# Altium PCB Fastino_Ground_Isolator.PcbDoc (part 3 of 4)
Units mm, origin at the board's own origin, x right, y up, seen from the top; angles counter-clockwise.
Board outline 40 x 100 mm, 4 copper layers (Top Layer, Layer 1, Layer 2, Bottom Layer), stack 1.551 mm thick; 157 components, 67 nets, 468 pads, 321 vias.
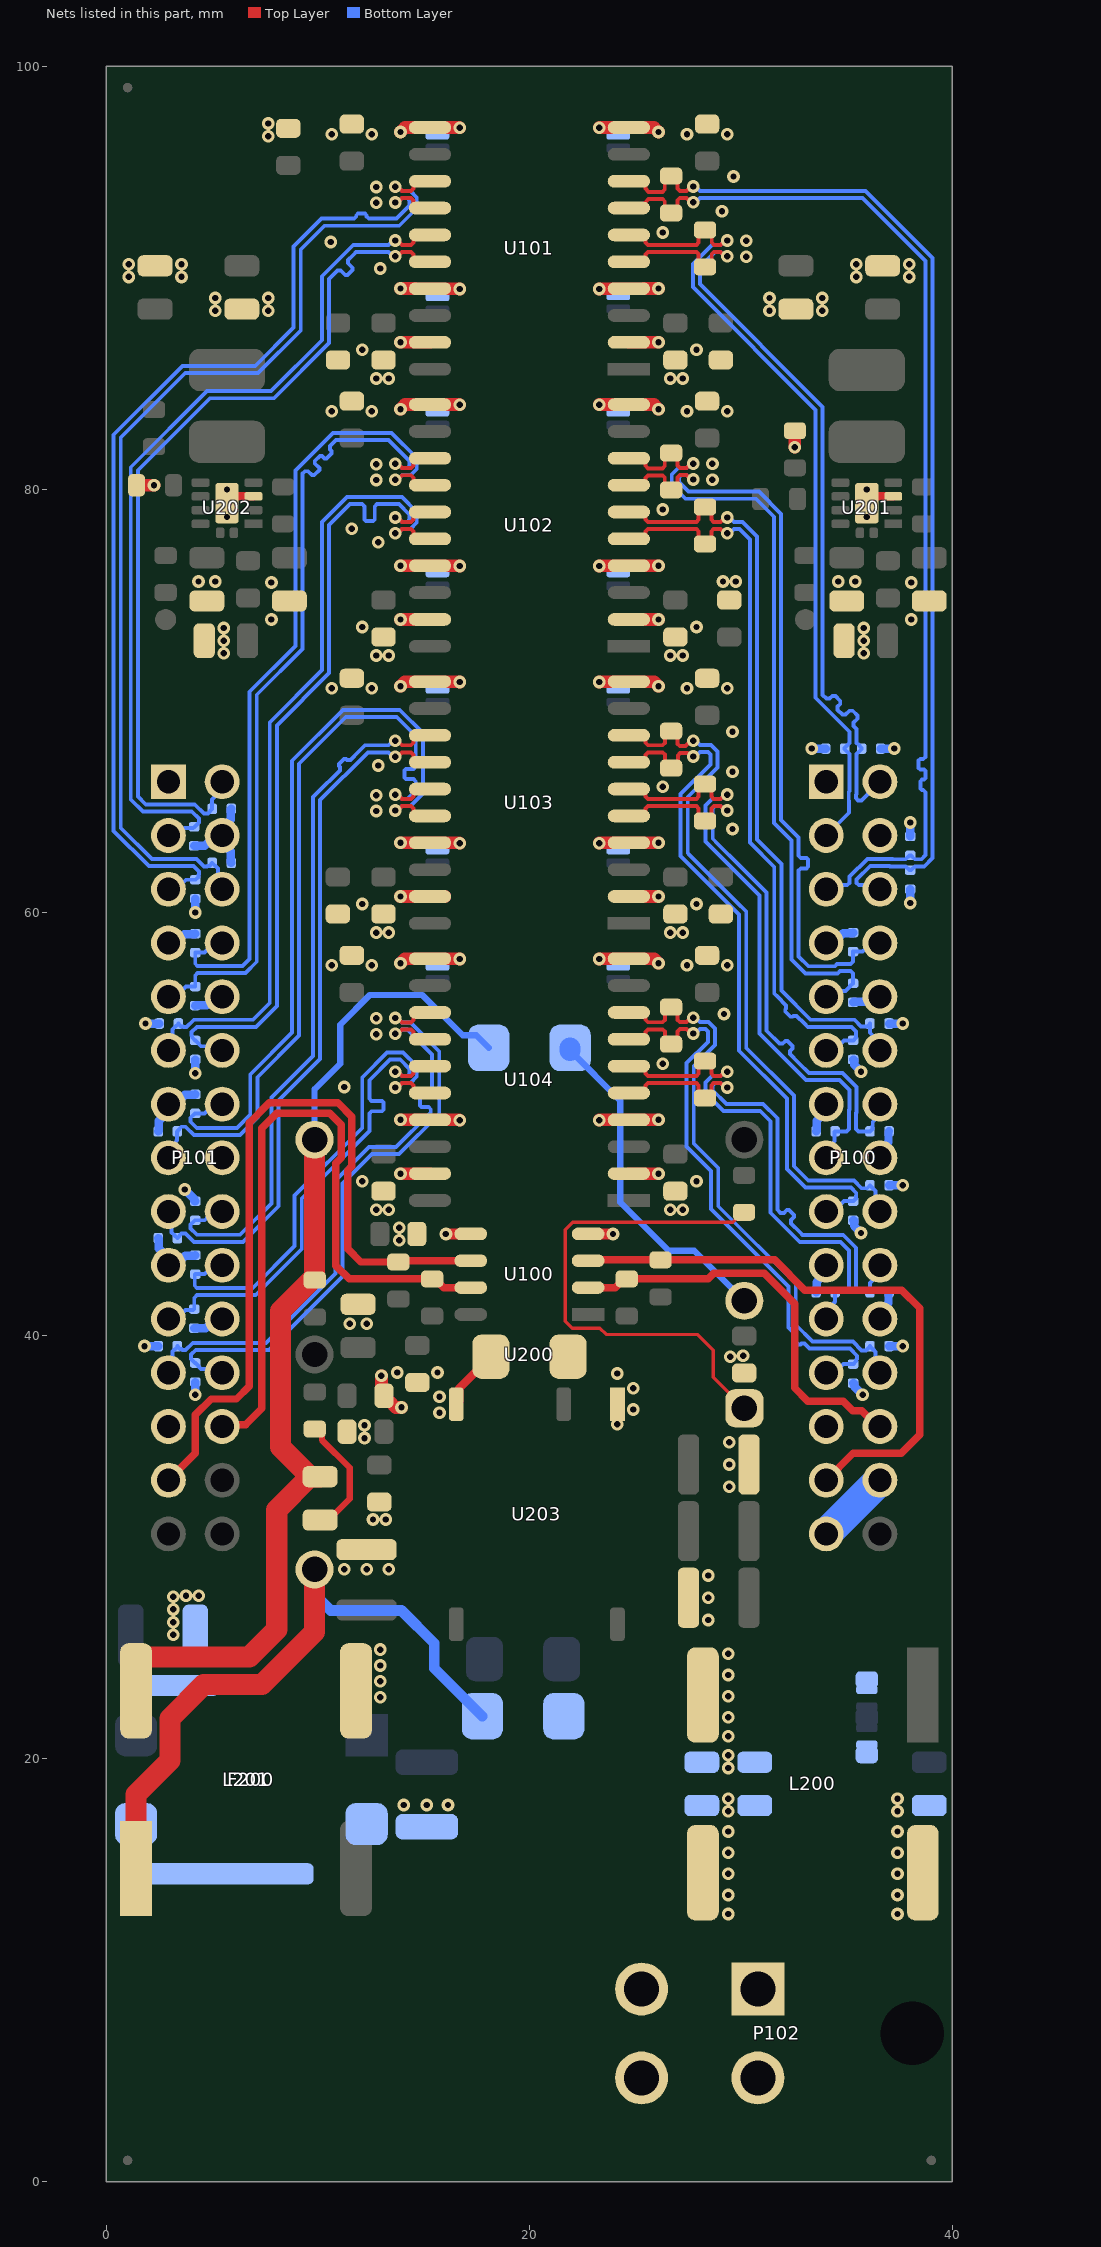
[diagram p4: the nets of this part, all layers, seen from the top]

## Part data (continued)
R200 R201 R202: library part _R_0603_TBD, "Resistor - SMD - TBD - EIA-0603", Case Code - in=0603, Case Code - mm=1608, company part number=-, Package="EIA-0603 (1.60 x 0.80 x 1.25mm)", Value Sort=0, Assembly House Supplier="Assembly House", Category=Resistor, Category_sub=Chip, Check#1 Symbol=PCLE_2018-08-18, Check#2 Attributes=PCLE_2018-08-18, Check#3 Footprint=PCLE_2018-08-18, Check#4 PCB Assembly="___ OK ___", Check#5 Functional="___ OK ___", ComponentLifeCycle=New, Date - Creation="2021-08-17 21:58", date - modification="2021-08-17 21:58", db_component_name=_R_0603_TBD, features=-, Height=1.25mm, ID=1, Manufacturer 1=TBD, Manufacturer Part Number 1=TBD, Mounting=SMD, Nb Terminations=2, Part Status=Active, pricing - digi-key="1=0.00000 / 10=0.00000 / 100=0.00000 / 1000=0.00000 / 2500=0.00000 / 5000=0.00000 USD", pricing - mouser="1=0.00000 / 10=0.00000 / 100=0.00000 / 1000=0.00000 / 2500=0.00000 / 5000=0.00000 USD", Replacement Part Number=-, RoHS=Yes, series=-, Size / Dimension="1.60 x 0.80 x 1.25mm", Supplier 1=TBD, Supplier 2=TBD, Supplier 3=TBD, Supplier 4=TBD, Supplier Part Number 1=TBD, Supplier Part Number 2=TBD, Supplier Part Number 3=TBD, Supplier Part Number 4=TBD, temperature=TBD, Tolerance=TBD, Voltage=TBD
R203 R206 R207 R210: library part Panasonic_ERJ-3EKF5102V, "Resistor - SMD - 51k - ±1% - ±100ppm/°C - 100mW - Thick Film - EIA-0603", Case Code - in=0603, Case Code - mm=1608, company part number=-, Manufacturer 1=Panasonic, Manufacturer Part Number 1=ERJ-3EKF5102V, Package="EIA-0603 (1.60 x 0.80 x 0.55mm)", Power=100mW, Supplier Part Number 1=P51.0KHCT-ND, temperature=-55..+155°C, Temperature Coefficient=±100ppm/°C, Tolerance=±1%, Value Sort=51000, Voltage=75V, Application="Automotive Grade", Assembly House Supplier="Assembly House", Category=Resistor, Category_sub=Chip, Check#1 Symbol=PCLE_2021-06-25, Check#2 Attributes=PCLE_2021-06-25, Check#3 Footprint=PCLE_2021-06-25, Check#4 PCB Assembly="___ OK ___", Check#5 Functional="___ OK ___", ComponentLifeCycle=New, ComponentLink1Description=Datasheet, ComponentLink1URL=https://www.mouser.com/datasheet/2/315/AOA0000C304-1149620.pdf, ComponentLink2Description="ERJ Series, Precision Resistor Datasheet", ComponentLink2URL=https://industrial.panasonic.com/cdbs/www-data/pdf/RDA0000/AOA0000C304.pdf, ComponentLink3Description="Fixed Resistors Product Catalog", ComponentLink3URL=https://industrial.panasonic.com/cdbs/www-data/pdf/RDM0000/DMM0000COL9.pdf, ComponentLink4Description="SMD Resistors Tech Guide", ComponentLink4URL=https://industrial.panasonic.com/cdbs/www-data/pdf/RDM0000/DMM0000COL11.pdf, ComponentLink5Description="ERJ series label chg 14/MAY/2020", ComponentLink5URL=http://media.digikey.com/pdf/PCNs/Panasonic/PCN.PG24.05.14.2020.pdf, Composition="Thick Film", Date - Creation="2021-06-17 22:26", date - modification="2021-06-17 22:26", db_component_name=Panasonic_ERJ-3EKF5102V, features="Automotive AEC-Q200", Height=0.55mm, ID=50, Mounting=SMD, Nb Terminations=2, Part Status=Active, pricing - digi-key="1=0.08000 / 10=0.03000 / 100=0.01220 / 1000=0.00547 / 2500=0.00475 / 5000=0.00392 USD", pricing - mouser="1=0.101 / 10=0.032 / 100=0.013 / 1000=0.006 / 5000=0.004 USD", Qualification=AEC-Q200, Replacement Part Number=-, RoHS=Yes, series=ERJ-3EK, Size / Dimension="1.60 x 0.80 x 0.55mm", Supplier 1=Digi-Key, Supplier 2=Digi-Key, Supplier 3=Digi-Key, Supplier 4=Mouser, Supplier Part Number 2=P51.0KHDKR-ND, Supplier Part Number 3=P51.0KHTR-ND, Supplier Part Number 4=667-ERJ-3EKF5102V, Technology="Thick Film"
R204 R208: library part Panasonic_ERJ-3EKF1502V, "Resistor - SMD - 15k - ±1% - 100 PPM / C - 100mW - 1.60x0.80mm", Case Code - in=0603, Case Code - mm=1608, company part number=-, Manufacturer 1=Panasonic, Manufacturer Part Number 1=ERJ-3EKF1502V, Package="SMD 1.60 x 0.80mm", Power=100mW, Supplier Part Number 1=P15.0KHCT-ND, temperature=-55..+155°C, Temperature Coefficient="100 PPM / C", Tolerance=±1%, Value Sort=15000, Voltage=75V, Application="Automotive Grade", Assembly House Supplier="Assembly House", Category=Resistor, Category_sub=Thick_Film, Check#1 Symbol="___ OK ___", Check#2 Attributes=PCLE_2026-03-30, Check#3 Footprint="___ OK ___", Check#4 PCB Assembly="___ OK ___", Check#5 Functional="___ OK ___", component_type=Thick_Film, ComponentLifeCycle=New, ComponentLink1Description=Datasheet, ComponentLink1URL=https://industrial.panasonic.com/cdbs/www-data/pdf/RDA0000/AOA0000C304.pdf, Date - Creation="2026-03-30 09:20", date - modification="2026-03-30 09:20", db_component_name=Panasonic_ERJ-3EKF1502V, Height=0.45mm, ID=173, Mounting=SMD, Qualification=AEC-Q200, Replacement Part Number=-, series=ERJ-xE, Size / Dimension="1.60 x 0.80 x 0.45mm", Supplier 1=Digi-Key, Supplier 2=Digi-Key, Supplier 3=Digi-Key, Supplier 4=Mouser, Supplier Part Number 2=P15.0KHDKR-ND, Supplier Part Number 3=P15.0KHTR-ND, Supplier Part Number 4=667-ERJ-3EKF1502V, Technology="Thick Film"
Text200: library part LOGO_ETH, "Logo - ETH", Manufacturer 1=-, Package=SMD, temperature=-40..+85°C, Assembly House Supplier=-, Category=Text, Category_sub=Text, Check#1 Symbol=PCLE_2022-10-04, Check#2 Attributes=PCLE_2022-10-04, Check#3 Footprint=PCLE_2022-10-04, Check#4 PCB Assembly=PCLE_2022-10-04, Check#5 Functional=PCLE_2022-10-04, Date - Creation=-, date - modification=-, db_component_name=LOGO_ETH, ID=6, Manufacturer Part Number 1=-, Part Status=Active, pricing - digi-key=-, pricing - mouser=-, RoHS=Yes, Supplier 1=-, Supplier Part Number 1=-
TP200 TP201: library part TP_SMD_Circle_1.00mm, "Test Point - SMD - 1.00mm Pad", company part number=-, Manufacturer 1=noBOM, Package="1.00mm Pad", temperature=-40..+85°C, Assembly House Supplier=Company, Category=Test_and_Measurement, Category_sub=Test_Points, Check#1 Symbol=PCLE_2021-06-28, Check#2 Attributes=PCLE_2021-06-28, Check#3 Footprint=PCLE_2021-06-28, Check#4 PCB Assembly=PCLE_2022-02-14, Check#5 Functional=PCLE_2022-02-14, component_type="Test Point", ComponentLifeCycle=Active, Date - Creation="2022-02-14 15:06", date - modification="2022-02-14 15:06", db_component_name=TP_SMD_Circle_1.00mm, Height=-, ID=4, Manufacturer Part Number 1=noBOM, Mounting=SMD, Part Status=Active, pricing - digi-key=-, pricing - mouser=-, Replacement Part Number=-, RoHS=Yes, Size / Dimension=-, Supplier 1=-, Supplier 2=-, Supplier 3=-, Supplier 4=-, Supplier Part Number 1=-, Supplier Part Number 2=-, Supplier Part Number 3=-, Supplier Part Number 4=-, Type="Test Point"
U100: library part AD_ADUM1255ASA, "Isolator - CAN/I2C - SMD - 2MHz - Unidirectional - 2 Channel - Propagation Delay=133.3 ns - 2.25..5.5V", company part number=-, isolation voltage=445Vrms, Manufacturer 1=AD, Package=SOIC-8, Power=440mW, Supplier Part Number 1=175-ADUM1255ASA+-ND, temperature=-40..+125°C, Assembly House Supplier="Assembly House", Category=Interface_ICs, Category_sub=Digital_Isolators, Check#1 Symbol=PCLE_2026-03-30, Check#2 Attributes=PCLE_2026-03-30, Check#3 Footprint=PCLE_2026-03-30, Check#4 PCB Assembly=-, Check#5 Functional=-, component_type="Isolator - Digital", ComponentLifeCycle=New, ComponentLink1Description=Datasheet, ComponentLink1URL=https://www.analog.com/media/en/technical-documentation/data-sheets/adum1255.pdf, Date - Creation="2026-03-27 12:27", date - modification="2026-03-27 12:27", db_component_name=AD_ADUM1255ASA, forward channels="2 Channel", ID=2, isolation type="Galvanic Isolation", isupply=1mA, Manufacturer Part Number 1=ADUM1255ASA+, maximum fall time="64.7 ns", Mounting=SMD, nb channels="2 Channel", Polarity=Unidirectional, product="Digital Isolators", propagation delay time="133.3 ns", pulse width distortion="94.2 ns", Replacement Part Number=-, RoHS=Yes, series=ADUM1255, Size / Dimension=-, Supplier 1=Digi-Key, Type="Digital Isolator", vsupply=2.25..5.50V
U101 U102 U103 U104: library part AD_ADN4654BRWZ, "Isolator - LVDS - SMD - 1.25 Gb/s - Unidirectional - 2 Channel - Propagation Delay=4 ns - 2V5", company part number=-, isolation voltage=5000Vrms, Manufacturer 1=AD, Package=SOIC-20, Power=2.78W, Supplier Part Number 1=505-ADN4654BRWZ-ND, temperature=-40..+125°C, Assembly House Supplier="Assembly House", Category=Interface_ICs, Category_sub=Digital_Isolators, Check#1 Symbol=PCLE_2026-03-30, Check#2 Attributes=PCLE_2026-03-30, Check#3 Footprint=PCLE_2026-03-30, Check#4 PCB Assembly=-, Check#5 Functional=-, component_type="Isolator - Digital", ComponentLifeCycle=New, ComponentLink1Description=Datasheet, ComponentLink1URL=https://www.analog.com/media/en/technical-documentation/data-sheets/ADN4654-4655-4656.pdf, data rate="1.25 Gb/s", Date - Creation="2026-03-27 12:46", date - modification="2026-03-27 12:46", db_component_name=AD_ADN4654BRWZ, forward channels="2 Channel", ID=3, isolation type="Magnetic Coupling", isupply=60mA, Manufacturer Part Number 1=ADN4654BRWZ, maximum fall time="350 ps", maximum rise time="350 ps", Mounting=SMD, nb channels="2 Channel", Polarity=Unidirectional, product="Digital Isolators", propagation delay time="4 ns", Replacement Part Number=-, RoHS=Yes, series=ADN4654, Size / Dimension=-, Supplier 1=Digi-Key, Type="LVDS Gigabit Isolator", vsupply=2.38..2.62V
U200: library part XP-Power_BCT40T24S12, "DC_DC_Converter - Isolated - 1 Output - Vin=9V..36V - Vout=12V - Imax=3.33 A", company part number=-, input voltage=9V..36V, input voltage - max=36V, input voltage - min=9V, input voltage, nominal=24V, isolation voltage=2kV, Manufacturer 1="XP Power", output current-channel 1="3.33 A", output power=40W, output voltage-channel 1=12V, Package="THT 25.40 x 25.40mm", Supplier Part Number 1=1470-BCT40T24S12-ND, temperature=-40..+105°C, Assembly House Supplier="Assembly House", Category=DC-DC_Converters, Category_sub=DC_DC_Converters_-_Through_Hole, Check#1 Symbol=PCLE_2026-04-13, Check#2 Attributes=PCLE_2026-03-31, Check#3 Footprint=PCLE_2026-04-13, Check#4 PCB Assembly=-, Check#5 Functional=-, component_type=DC_DC_Converter, ComponentLifeCycle=New, ComponentLink1Description=Datasheet, ComponentLink1URL=https://mm.digikey.com/Volume0/opasdata/d220001/medias/docus/7179/BCT40T.pdf, Date - Creation="2026-03-30 18:50", date - modification="2026-03-30 18:50", db_component_name=XP-Power_BCT40T24S12, dimensions="25.4 mm x 25.4 mm x 10 mm", Height=10.50mm, ID=14, industry=Industrial, Isolation=Isolated, Manufacturer Part Number 1=BCT40T24S12, Mounting=THT, Nb Outputs="1 Output", Part Status="New Product", product=Isolated, Replacement Part Number=-, RoHS=Yes, series=BCT40T, Size / Dimension="25.40 x 25.40 x 10.50mm", Supplier 1=Digi-Key, Supplier 2=Digi-Key, Supplier 3=Digi-Key, Supplier 4=Mouser, Supplier Part Number 2=1470-BCT40T24S12-ND, Supplier Part Number 3=1470-BCT40T24S12-ND, Supplier Part Number 4=209-BCT40T24S12
U201 U202: library part RECOM_RPL-1.0-R, "IC - DC-DC switcher - Vin=3V..22V - Vout=600mV..12V - IOut=1A - 1 Output", company part number=-, input voltage=3V..22V, input voltage - max=22V, input voltage - min=3V, Manufacturer 1=RECOM, Package=LGA-11, Quiescent Current="5 uA", Supplier Part Number 1=945-RPL-1.0-RCT-ND, Switching Frequency="1.25 GHz", temperature=-40..+125°C, Assembly House Supplier="Assembly House", Category=PMIC_-_Power_Management_ICs, Category_sub=Switching_Voltage_Regulators, Check#1 Symbol=PCLE_2026-03-30, Check#2 Attributes=PCLE_2026-03-30, Check#3 Footprint=PCLE_2026-03-30, Check#4 PCB Assembly=-, Check#5 Functional=-, component_type="IC - DC-DC switcher", ComponentLifeCycle=New, ComponentLink1Description=Datasheet, ComponentLink1URL=https://www.mouser.com/datasheet/3/887/1/RPL_1.0.pdf, Date - Creation="2026-03-27 17:01", date - modification="2026-03-27 17:01", db_component_name=RECOM_RPL-1.0-R, ID=7, iout=1A, Manufacturer Part Number 1=RPL-1.0-R, Mounting=SMD, Nb Outputs="1 Output", Replacement Part Number=-, RoHS=Yes, series=RPL-1.0, shutdown=Shutdown, Size / Dimension=-, Supplier 1=Digi-Key, Supplier 2=Digi-Key, Supplier 3=Digi-Key, Supplier 4=Mouser, Supplier Part Number 2=945-RPL-1.0-RDKR-ND, Supplier Part Number 3=945-RPL-1.0-RTR-ND, Supplier Part Number 4=919-RPL-1.0-R, vout=600mV..12V
U203: library part XP-Power_PBT01F03S3V3, "DC_DC_Converter - SMD - Isolated - 1 Output - Vin=3V..3.60V - Vout=3.30V - Imax=303 mA", company part number=-, input voltage=3V..3.60V, input voltage - max=3.60V, input voltage - min=3V, input voltage, nominal=3.30V, isolation voltage=1kV, Manufacturer 1="XP Power", output current-channel 1="303 mA", output power=1W, Package="SMD 12.75 x 10.70mm", temperature=-40..+105°C, Application="Industrial, Instrumentation", Assembly House Supplier="Assembly House", Category=DC-DC_Converters, Category_sub=DC_DC_Converters_-_SMD, Check#1 Symbol=PCLE_2026-03-30, Check#2 Attributes=PCLE_2026-03-23, Check#3 Footprint=PCLE_2026-03-30, Check#4 PCB Assembly=-, Check#5 Functional=-, component_type=DC_DC_Converter, ComponentLifeCycle=New, ComponentLink1Description=Datasheet, ComponentLink1URL=https://www.mouser.com/catalog/specsheets/XP_Power_SF_PBT01F.pdf, Date - Creation="2026-03-23 21:00", date - modification="2026-03-23 21:00", db_component_name=XP-Power_PBT01F03S3V3, dimensions="12.75 mm x 10.7 mm x 7 mm", Height=7.00mm, ID=13, industry=Industrial, Isolation=Isolated, Manufacturer Part Number 1=PBT01F03S3V3, Mounting=SMD, Nb Outputs="1 Output", output voltage-channel 1=3.30V, Part Status="New Product", product=Isolated, Replacement Part Number=-, RoHS=Yes, series=PBT01, Size / Dimension="12.75 x 10.70 x 7.00mm", Supplier 1=Digi-Key, Supplier 2=Digi-Key, Supplier 3=Digi-Key, Supplier 4=Mouser, Supplier Part Number 1=PBT01F03S3V3, Supplier Part Number 2=PBT01F03S3V3, Supplier Part Number 3=PBT01F03S3V3, Supplier Part Number 4=209-PBT01F03S3V3
Z200: library part Stackup_4L, company part number=-, Manufacturer 1=TBD, Package=SMD, temperature=-40..+85°C, Assembly House Supplier=Company, Category=PCB, Category_sub=Assembly, Check#1 Symbol=PCLE_2021-10-04, Check#2 Attributes=PCLE_2021-10-04, Check#3 Footprint=PCLE_2021-10-04, Check#4 PCB Assembly=PCLE_2021-10-04, Check#5 Functional=PCLE_2021-10-04, ComponentLifeCycle=New, Date - Creation=2021-10-04, date - modification=2021-10-04, db_component_name=Stackup_4L, Height=-, ID=3, Manufacturer Part Number 1=TBD, Mounting=SMD, Part Status=Active, pricing - digi-key=-, pricing - mouser=-, Replacement Part Number=-, RoHS=Yes, Size / Dimension=-, Supplier 1=-, Supplier 2=-, Supplier 3=-, Supplier 4=-, Supplier Part Number 1=-, Supplier Part Number 2=-, Supplier Part Number 3=-, Supplier Part Number 4=-, Type=-

## Via types
v1: diameter 0.6, hole 0.3, Top Layer to Bottom Layer, 321 vias

## Nets (pads, with @x,y where several pads share a name; then routed paths per layer and width w, separated by ;. In a path a pad name is that pad's centre, name@x,y a point inside that pad or via, vN(x,y) a via of type N, cw(c..) or ccw(c..) an arc to the next point about the centre after c; other vN are vias at no path point)
CH_0_N: D104.1 P100.3 R106.1 U101.6 | length 38.8
  Top Layer w0.185: U101.6@24.7,92.035 25.288,92.035 25.479,91.843 25.479,91.684 25.596,91.568 27.008,91.568 27.892,91.567 28,91.676 28,91.976 28.299,92.275 28.317,92.275 28.617,91.976 28.617,91.676 28.725,91.568 29.034,91.568 29.241,91.774 v1(29.35,91.774)
  Bottom Layer w0.185: v1(29.35,91.774) 29.241,91.774 29.034,91.568 28.634,91.568 27.723,90.656 27.723,89.567 33.523,83.767 33.523,70.154 35.132,68.544 35.132,68.016 34.9,67.783 D104.1@34.9,67.75 34.9,67.717 35.132,67.484 35.132,65.74 35.097,65.704 35.097,65.273 35.105,65.264 35.105,64.715 P100.3@34.03,63.64
CH_0_P: D100.1 P100.2 R106.2 U101.5 | length 38.8
  Top Layer w0.185: U101.5@24.7,90.765 25.288,90.765 25.479,90.957 25.479,91.116 25.596,91.232 26.869,91.232 27.892,91.232 28,91.124 28,90.824 28.299,90.525 28.317,90.525 28.617,90.824 28.617,91.124 28.725,91.232 29.034,91.232 29.241,91.025 v1(29.35,91.025)
  Bottom Layer w0.185: v1(29.35,91.025) 29.241,91.025 29.034,91.232 28.772,91.232 28.058,90.518 28.058,89.706 33.858,83.906 33.858,71.092 33.858,70.292 34.041,70.109 34.194,70.109 34.317,70.232 34.468,70.232 34.695,70.005 34.695,69.853 34.571,69.73 34.571,69.579 34.798,69.352 34.95,69.352 35.136,69.538 35.287,69.538 35.514,69.311 35.514,69.159 35.329,68.974 35.329,68.821 35.467,68.683 35.467,68.016 35.548,67.936 35.7,67.783 D100.1@35.7,67.75 35.7,67.717 35.467,67.484 35.467,65.601 35.432,65.565 35.432,65.412 35.54,65.303 35.693,65.303 P100.2@36.57,66.18
CH_0_R_N: D120.1 P101.3 U101.15 | length 41.9
  Top Layer w0.185: v1(13.65,91.775) 13.759,91.775 13.966,91.568 14.404,91.568 14.521,91.684 14.521,91.843 14.712,92.035 U101.15@15.3,92.035
  Bottom Layer w0.185: P101.3@2.93,63.64 3.326,63.64 3.684,63.998 4.098,63.998 D120.1@4.15,64.05 4.164,64.05 4.369,64.255 4.369,64.444 4.035,64.779 1.722,64.779 1.15,65.35 1.15,81.05 4.75,84.65 7.776,84.65 10.182,87.056 10.182,90.082 11.668,91.568 13.334,91.568 13.541,91.775 v1(13.65,91.775)
CH_0_R_P: D116.1 P101.2 U101.16 | length 41.9
  Top Layer w0.185: v1(13.65,91.026) 13.759,91.026 13.966,91.233 14.404,91.233 14.521,91.116 14.521,90.957 14.712,90.765 U101.16@15.3,90.765
  Bottom Layer w0.185: P101.2@5.47,66.18 5.47,65.815 5,65.345 D116.1@5,64.9 5,64.886 4.795,64.681 4.606,64.681 4.173,65.114 1.86,65.114 1.485,65.489 1.485,80.911 4.889,84.315 7.915,84.315 10.517,86.917 10.517,89.943 10.925,90.352 11.079,90.352 11.29,90.14 11.393,90.14 11.633,90.38 11.633,90.483 11.422,90.695 11.422,90.848 11.668,91.094 11.806,91.233 13.334,91.233 13.541,91.026 v1(13.65,91.026)
CH_1_N: D112.1 P100.6 R110.1 U101.8 | length 51.1
  Top Layer w0.185: U101.8@24.7,94.575 25.288,94.575 25.479,94.383 25.479,94.224 25.634,94.069 26.289,94.069 26.398,94.178 26.398,94.526 26.697,94.825 26.706,94.825 27.005,94.526 27.005,94.226 27.113,94.118 27.434,94.118 27.641,94.324 v1(27.75,94.324)
  Bottom Layer w0.185: v1(27.75,94.324) 27.859,94.324 28.066,94.118 35.883,94.118 39.058,90.943 39.058,62.574 38.666,62.182 38.218,62.182 38.036,62 37.964,62 37.782,62.182 37.047,62.182 37.027,62.203 36.113,62.203 35.468,61.557 35.468,61.403 35.576,61.295 36.375,61.295 P100.6@36.57,61.1
CH_1_P: D108.1 P100.5 R110.2 U101.7 | length 51.1
  Top Layer w0.185: U101.7@24.7,93.305 25.288,93.305 25.479,93.497 25.479,93.58 25.634,93.734 26.289,93.734 26.398,93.626 26.398,93.374 26.697,93.075 R110.2@26.7,93.075 26.706,93.075 27.005,93.374 27.005,93.674 27.113,93.783 27.434,93.783 27.641,93.575 v1(27.75,93.575)
  Bottom Layer w0.185: v1(27.75,93.575) 27.859,93.575 28.066,93.782 35.744,93.782 38.723,90.804 38.723,67.936 38.723,67.358 38.614,67.25 38.475,67.25 38.402,67.177 38.402,66.837 38.475,66.765 38.65,66.765 38.723,66.692 38.723,66.352 38.65,66.28 38.561,66.28 38.488,66.207 38.488,65.867 38.561,65.795 38.614,65.795 38.723,65.686 38.723,65.032 38.723,62.712 38.528,62.518 38.218,62.518 38.036,62.7 37.964,62.7 37.782,62.518 37.185,62.518 37.165,62.538 35.975,62.538 35.133,61.695 35.133,61.403 35.024,61.295 34.225,61.295 P100.5@34.03,61.1
CH_1_R_N: D128.1 P101.6 U101.13 | length 49.5
  Top Layer w0.185: v1(13.65,94.315) 13.759,94.315 13.966,94.108 14.404,94.108 14.521,94.224 14.521,94.383 14.712,94.575 U101.13@15.3,94.575
  Bottom Layer w0.185: D128.1@5,62.35 D128.1@5,62.336 ; P101.6@5.47,61.1 5.265,61.305 5.265,62.084 5.157,62.193 5.143,62.193 D128.1@5,62.336 ; v1(13.65,94.315) 13.759,94.315 13.966,94.108 14.366,94.108 14.671,93.803 14.671,93.296 13.843,92.468 10.304,92.468 9.185,91.349 9.185,87.511 7.174,85.5 3.727,85.5 0.677,82.45 0.677,63.996 2.146,62.528 4.259,62.528 4.606,62.181 4.759,62.181 4.783,62.205 4.869,62.205 D128.1@5,62.336
CH_1_R_P: D124.1 P101.5 U101.14 | length 49.5
  Top Layer w0.185: v1(13.65,93.566) 13.759,93.566 13.966,93.773 14.404,93.773 14.521,93.656 14.521,93.497 14.712,93.305 U101.14@15.3,93.305
  Bottom Layer w0.185: P101.5@2.93,61.1 3.315,61.1 3.765,61.55 D124.1@4.2,61.55 4.214,61.55 4.345,61.681 4.345,61.767 4.369,61.791 4.369,61.944 4.121,62.192 2.008,62.192 0.342,63.858 0.342,82.589 3.589,85.835 7.035,85.835 8.85,87.65 8.85,91.488 10.165,92.803 11.609,92.803 11.701,92.803 11.81,92.911 11.81,92.966 11.882,93.039 12.222,93.039 12.295,92.966 12.295,92.911 12.403,92.803 13.05,92.803 13.704,92.803 14.336,93.435 14.336,93.664 14.228,93.773 13.966,93.773 13.759,93.566 v1(13.65,93.566)
CH_2_N: D113.1 P100.9 R111.1 U102.8 | length 37.5
  Top Layer w0.185: U102.8@25.288,81.475 25.479,81.283 25.479,81.124 25.603,81 26.289,81 26.398,81.109 26.398,81.426 26.697,81.725 26.706,81.725 27.005,81.426 27.005,81.126 27.113,81.018 27.434,81.018 27.641,81.224 v1(27.75,81.224)
  Bottom Layer w0.185: v1(27.75,81.224) 27.641,81.224 27.434,81.018 27.034,81.018 26.729,80.713 26.729,80.206 27.372,79.563 30.713,79.563 31.565,78.711 31.565,64.235 32.393,63.408 32.393,57.779 33.047,57.125 34.577,57.125 34.685,57.232 35.192,57.232 35.3,57.124 D113.1@35.3,56.65 35.286,56.65 35.155,56.519 35.155,56.505 34.945,56.295 34.305,56.295 P100.9@34.03,56.02
CH_2_P: D109.1 P100.8 R111.2 U102.7 | length 37.5
  Top Layer w0.185: U102.7@24.7,80.205 25.288,80.205 25.479,80.397 25.479,80.542 25.603,80.665 26.289,80.665 26.398,80.557 26.398,80.274 26.697,79.975 26.706,79.975 27.005,80.274 27.005,80.574 27.113,80.683 27.434,80.683 27.641,80.476 v1(27.75,80.476)
  Bottom Layer w0.185: v1(27.75,80.476) 27.641,80.476 27.434,80.683 27.173,80.683 27.064,80.574 27.064,80.345 27.511,79.898 28.095,79.898 30.848,79.898 30.852,79.898 31.9,78.85 31.9,64.374 32.728,63.546 32.728,63.1 32.728,62.683 32.836,62.574 33.096,62.574 33.169,62.502 33.169,62.162 33.096,62.089 32.836,62.089 32.728,61.981 32.728,61.403 32.728,57.918 33.185,57.46 34.439,57.46 34.546,57.567 35.192,57.567 35.3,57.676 D109.1@35.3,58.15 35.746,58.15 35.876,58.28 36.29,58.28 P100.8@36.57,58.56
CH_2_R_N: D129.1 P101.9 U102.13 | length 39.5
  Top Layer w0.185: v1(13.65,81.215) 13.759,81.215 13.966,81.008 14.404,81.008 14.521,81.124 14.521,81.283 14.712,81.475 U102.13@15.3,81.475
  Bottom Layer w0.185: P101.9@2.93,56.02 3.285,56.02 3.765,56.5 D129.1@4.2,56.5 4.2,57.024 4.308,57.132 6.568,57.132 7.108,57.672 7.108,70.297 9.277,72.467 9.277,80.307 9.277,80.754 9.386,80.862 9.539,80.862 9.721,80.681 9.824,80.681 10.064,80.921 10.064,81.024 9.85,81.237 9.85,81.34 10.09,81.58 10.193,81.58 10.304,81.469 10.407,81.469 10.647,81.709 10.647,81.812 10.561,81.898 10.561,82.051 10.835,82.325 10.853,82.342 13.339,82.342 14.336,81.345 14.336,81.116 14.228,81.008 13.966,81.008 13.759,81.215 v1(13.65,81.215)
CH_2_R_P: D125.1 P101.8 U102.14 | length 39.5
  Top Layer w0.185: v1(13.65,80.466) 13.759,80.466 13.966,80.673 14.404,80.673 14.521,80.556 14.521,80.397 14.712,80.205 U102.14@15.3,80.205
  Bottom Layer w0.185: P101.8@5.47,58.56 5.095,58.56 4.635,58.1 D125.1@4.2,58.1 4.2,57.576 4.308,57.467 6.429,57.467 6.773,57.811 6.773,70.436 8.942,72.606 8.942,80.906 10.714,82.678 13.477,82.678 14.671,81.484 14.671,80.977 14.366,80.673 13.966,80.673 13.759,80.466 v1(13.65,80.466)
CH_3_N: D105.1 P100.12 R107.1 U102.6 | length 35.5
  Top Layer w0.185: U102.6@25.288,78.935 25.479,78.743 25.479,78.584 25.596,78.468 26.321,78.468 27.008,78.468 27.892,78.467 28,78.576 28,78.876 28.299,79.175 28.599,78.876 28.599,78.576 28.707,78.468 29.034,78.468 29.241,78.674 v1(29.35,78.674)
  Bottom Layer w0.185: v1(29.35,78.674) 29.459,78.674 29.666,78.468 30.066,78.468 30.758,77.776 30.758,63.443 31.908,62.293 31.908,56.316 33.296,54.927 35.359,54.927 35.682,54.605 35.969,54.605 36.1,54.736 D105.1@36.1,54.75 ; D105.1@36.1,54.746 36.1,54.315 36.57,53.845 P100.12@36.57,53.48
CH_3_P: D101.1 P100.11 R107.2 U102.5 | length 35.5
  Top Layer w0.185: U102.5@25.288,77.665 25.479,77.857 25.479,78.016 25.596,78.133 26.182,78.133 26.869,78.133 27.892,78.132 28,78.024 28,77.724 28.299,77.425 28.599,77.724 28.599,78.024 28.707,78.132 28.77,78.132 29.034,78.133 29.241,77.926 v1(29.35,77.926)
  Bottom Layer w0.185: v1(29.35,77.926) 29.459,77.926 29.666,78.133 29.928,78.133 30.408,77.652 30.422,77.638 30.422,75.869 30.422,63.304 31.572,62.154 31.572,56.178 31.73,56.02 32.138,55.612 32.138,55.458 32.095,55.415 32.095,55.312 32.335,55.072 32.438,55.072 32.481,55.115 32.635,55.115 33.004,54.746 33.158,54.592 35.221,54.592 35.445,54.368 35.445,54.081 35.314,53.95 34.865,53.95 34.395,53.48 P100.11@34.03,53.48
CH_3_R_N: D121.1 P101.12 U102.15 | length 39.1
  Top Layer w0.185: v1(13.65,78.675) 13.759,78.675 13.966,78.467 14.404,78.467 14.521,78.584 14.521,78.743 14.712,78.935 U102.15@15.3,78.935
  Bottom Layer w0.185: P101.12@5.47,53.48 5.276,53.674 4.476,53.674 4.357,53.792 4.357,53.807 4.214,53.95 4.186,53.95 4.055,54.081 4.055,54.167 4.031,54.191 4.031,54.344 4.279,54.593 7.066,54.593 8.057,55.584 8.057,68.847 10.527,71.317 10.527,78.317 11.516,79.305 ; 11.516,79.305 12.094,79.305 12.202,79.197 12.202,78.585 12.275,78.512 12.614,78.512 12.687,78.585 12.687,79.197 12.796,79.305 13.1,79.305 13.836,79.305 14.336,78.805 14.336,78.576 14.227,78.468 13.966,78.468 13.759,78.675 v1(13.65,78.675)
CH_3_R_P: D117.1 P101.11 U102.16 | length 39.1
  Top Layer w0.185: v1(13.65,77.926) 13.759,77.926 13.966,78.132 14.404,78.132 14.521,78.016 14.521,77.857 14.712,77.665 U102.16@15.3,77.665
  Bottom Layer w0.185: P101.11@2.93,53.48 3.124,53.674 3.124,54.474 3.255,54.605 3.269,54.605 D117.1@3.4,54.736 ; D117.1@3.4,54.75 D117.1@3.4,54.736 ; v1(13.65,77.926) 13.759,77.926 13.966,78.133 14.366,78.133 14.671,78.437 14.671,78.944 13.975,79.64 11.377,79.64 10.192,78.456 10.192,71.456 7.722,68.986 7.722,55.722 6.928,54.928 4.141,54.928 3.794,54.581 3.641,54.581 3.617,54.605 3.531,54.605 D117.1@3.4,54.736
CH_4_N: D106.1 P100.15 R108.1 U103.6 | length 27.8
  Top Layer w0.185: U103.6@25.288,65.835 25.479,65.643 25.479,65.484 25.596,65.368 26.019,65.368 27.754,65.367 27.892,65.367 28,65.476 28,65.776 28.299,66.075 28.303,66.075 28.602,65.776 28.602,65.476 28.71,65.367 29.034,65.367 29.241,65.574 v1(29.35,65.574)
  Bottom Layer w0.185: v1(29.35,65.574) 29.241,65.574 29.034,65.367 28.634,65.367 28.329,65.063 28.329,63.347 30.873,60.804 30.873,54.277 33.077,52.073 34.662,52.073 35.129,51.606 35.129,50.679 35.107,50.658 35.107,49.758 34.999,49.65 D106.1@34.45,49.65 34.428,49.628 34.428,49.241 34.418,49.231 34.418,49.184 34.03,48.796 P100.15@34.03,48.4
CH_4_P: D102.1 P100.14 R108.2 U103.5 | length 27.8
  Top Layer w0.185: U103.5@25.288,64.565 25.479,64.757 25.479,64.916 25.596,65.033 25.88,65.033 27.892,65.032 28,64.924 28,64.624 28.299,64.325 28.31,64.325 28.609,64.624 28.609,64.924 28.717,65.032 29.034,65.032 29.241,64.825 v1(29.35,64.825)
  Bottom Layer w0.185: v1(29.35,64.825) 29.241,64.825 29.034,65.032 28.772,65.032 28.664,64.924 28.664,63.486 28.9,63.25 29.9,62.25 31.208,60.943 31.208,54.416 31.263,54.36 31.823,53.8 31.976,53.8 32.098,53.922 32.201,53.922 32.441,53.682 32.441,53.579 32.319,53.457 32.319,53.304 32.728,52.896 33.216,52.408 34.801,52.408 35.464,51.744 35.464,50.54 35.442,50.519 35.442,49.758 35.551,49.65 D102.1@36.1,49.65 36.22,49.77 36.22,49.904 36.232,49.916 36.232,50.099 36.29,50.157 36.29,50.66 P100.14@36.57,50.94
CH_4_R_N: D122.1 P101.15 U103.15 | length 36.8
  Top Layer w0.185: v1(13.65,65.574) 13.759,65.574 13.966,65.367 14.404,65.367 14.521,65.484 14.521,65.643 14.712,65.835 U103.15@15.3,65.835
  Bottom Layer w0.185: P101.15@2.93,48.4 2.93,48.796 3.318,49.184 3.318,49.231 3.328,49.241 3.328,49.628 D122.1@3.35,49.65 3.35,49.664 3.555,49.869 3.744,49.869 4.131,49.482 6.306,49.482 7.135,50.311 7.135,52.211 9.108,54.184 9.108,67.034 11.316,69.243 13.727,69.243 14.623,68.347 14.623,67.474 14.623,66.897 14.514,66.788 14.159,66.788 14.086,66.715 14.086,66.376 14.159,66.303 14.514,66.303 14.623,66.195 14.623,66 14.623,65.763 14.227,65.367 13.966,65.367 13.759,65.574 v1(13.65,65.574)
CH_4_R_P: D118.1 P101.14 U103.16 | length 36.8
  Top Layer w0.185: v1(13.65,64.825) 13.759,64.825 13.966,65.032 14.404,65.032 14.521,64.916 14.521,64.757 14.712,64.565 U103.16@15.3,64.565
  Bottom Layer w0.185: P101.14@5.47,50.94 5.075,50.94 4.635,50.5 4.186,50.5 3.981,50.295 3.981,50.106 4.269,49.817 6.167,49.817 6.8,50.45 6.8,52.35 8.772,54.322 8.772,67.172 11.178,69.578 13.866,69.578 14.958,68.486 14.958,65.624 14.366,65.032 13.966,65.032 13.759,64.825 v1(13.65,64.825)
CH_5_N: D114.1 P100.18 R112.1 U103.8 | length 33.1
  Top Layer w0.185: U103.8@25.222,68.375 25.288,68.375 25.479,68.183 25.479,68.024 25.596,67.908 26.292,67.908 26.4,68.016 26.4,68.325 26.7,68.625 R112.1@26.77,68.555 ; R112.1@26.7,68.575 26.706,68.575 27.005,68.276 27.005,67.976 27.113,67.867 27.384,67.867 27.641,68.124 v1(27.75,68.124)
  Bottom Layer w0.185: v1(27.75,68.124) 27.859,68.124 28.066,67.917 28.58,67.917 28.885,67.613 28.885,66.861 27.485,65.461 27.485,62.815 27.551,62.749 29.795,60.505 30.25,60.05 30.25,53.6 32.508,51.343 32.508,48.003 33.183,47.327 35.34,47.327 35.706,46.962 35.969,46.962 36.1,47.093 D114.1@36.1,47.1 36.1,47.086 36.243,46.943 36.247,46.943 36.355,46.834 36.355,46.075 P100.18@36.57,45.86
CH_5_P: D110.1 P100.17 R112.2 U103.7 | length 33.2
  Top Layer w0.185: U103.7@24.7,67.105 25.288,67.105 25.479,67.297 25.479,67.456 25.596,67.573 26.292,67.573 26.4,67.464 26.4,67.124 26.649,66.875 26.765,66.875 27.014,67.124 27.014,67.424 27.122,67.532 27.481,67.532 27.638,67.375 v1(27.75,67.375)
  Bottom Layer w0.185: v1(27.75,67.375) 27.859,67.375 28.066,67.582 28.442,67.582 28.55,67.474 28.55,67 27.15,65.6 27.15,62.676 29.915,59.911 29.915,53.461 32.173,51.204 32.173,47.864 33.044,46.992 35.201,46.992 35.45,46.744 35.45,46.591 35.445,46.586 35.445,46.481 35.314,46.35 34.862,46.35 34.372,45.86 P100.17@34.03,45.86
CH_5_R_N: D130.1 P101.18 U103.13 | length 33.8
  Top Layer w0.185: v1(13.65,68.115) 13.759,68.115 13.966,67.908 14.404,67.908 14.521,68.024 14.521,68.183 14.712,68.375 U103.13@15.3,68.375
  Bottom Layer w0.185: P101.18@5.47,45.86 5.19,45.58 4.776,45.58 4.646,45.45 4.186,45.45 3.981,45.245 3.981,45.056 4.272,44.765 6.315,44.765 7.8,46.25 7.8,51.25 9.77,53.22 9.77,65.454 9.934,65.618 11.037,66.72 11.037,66.874 10.991,66.919 10.991,67.022 11.231,67.262 11.334,67.262 11.38,67.217 11.533,67.217 11.941,67.625 12.224,67.908 13.334,67.908 13.541,68.115 v1(13.65,68.115)
CH_5_R_P: D126.1 P101.17 U103.14 | length 33.8
  Top Layer w0.185: v1(13.65,67.366) 13.759,67.366 13.966,67.573 14.404,67.573 14.521,67.456 14.521,67.297 14.712,67.105 U103.14@15.3,67.105
  Bottom Layer w0.185: P101.17@2.93,45.86 3.084,45.706 3.084,44.866 3.205,44.745 3.219,44.745 3.219,44.731 D126.1@3.35,44.6 3.35,44.614 3.555,44.819 3.744,44.819 4.133,44.43 6.454,44.43 8.135,46.111 8.135,51.111 10.105,53.081 10.105,65.315 12.363,67.573 13.334,67.573 13.541,67.366 v1(13.65,67.366)
CH_6_N: D107.1 P100.21 R109.1 U104.6 | length 24.1
  Top Layer w0.185: U104.6@24.7,52.735 25.288,52.735 25.479,52.543 25.479,52.384 25.596,52.268 27.008,52.268 27.892,52.268 28,52.376 28,52.676 28.299,52.975 28.599,52.676 28.599,52.376 28.707,52.267 29.034,52.267 29.241,52.474 v1(29.35,52.474)
  Bottom Layer w0.185: v1(29.35,52.474) 29.241,52.474 29.034,52.267 28.634,52.267 28.329,51.963 28.329,51.456 29.17,50.615 30.911,50.615 31.395,50.131 31.395,45.806 32.778,44.422 34.697,44.422 35.108,44.012 35.108,42.158 34.999,42.05 D107.1@34.45,42.05 34.45,41.614 34.418,41.582 34.418,41.564 34.03,41.176 P100.21@34.03,40.78
CH_6_P: D103.1 P100.20 R109.2 U104.5 | length 24.1
  Top Layer w0.185: U104.5@24.7,51.465 25.288,51.465 25.479,51.657 25.479,51.816 25.596,51.933 26.869,51.933 27.892,51.933 28,51.824 28,51.524 28.299,51.225 28.599,51.524 28.599,51.824 28.707,51.932 29.034,51.932 29.241,51.725 v1(29.35,51.725)
  Bottom Layer w0.185: v1(29.35,51.725) 29.241,51.725 29.034,51.932 28.772,51.932 28.664,51.824 28.664,51.595 29.309,50.95 31.05,50.95 31.73,50.27 31.73,46.744 31.73,45.945 31.874,45.801 32.027,45.801 32.163,45.937 32.266,45.937 32.506,45.697 32.506,45.594 32.37,45.458 32.37,45.305 32.778,44.896 32.917,44.758 34.836,44.758 35.443,44.151 35.443,42.158 35.551,42.05 D103.1@36.1,42.05 36.1,42.485 36.57,42.955 P100.20@36.57,43.32
CH_6_R_N: D123.1 P101.21 U104.15 | length 24
  Top Layer w0.185: v1(13.65,52.475) 13.759,52.475 13.966,52.268 14.404,52.268 14.521,52.384 14.521,52.543 14.712,52.735 U104.15@15.3,52.735
  Bottom Layer w0.185: P101.21@2.93,40.78 3.326,40.78 3.744,41.198 4.098,41.198 D123.1@4.15,41.25 4.15,41.774 4.283,41.907 7.057,41.907 9.235,44.085 9.235,46.474 12.428,49.667 12.428,49.916 12.428,50.493 12.536,50.602 13.031,50.602 13.103,50.675 13.103,51.014 13.031,51.087 12.536,51.087 12.428,51.195 12.428,51.824 12.428,52.069 13.411,53.052 13.889,53.052 14.336,52.605 14.336,52.376 14.228,52.268 13.966,52.268 13.759,52.475 v1(13.65,52.475)
CH_6_R_P: D119.1 P101.20 U104.16 | length 24
  Top Layer w0.185: v1(13.65,51.726) 13.759,51.726 13.966,51.932 14.404,51.932 14.521,51.816 14.521,51.657 14.712,51.465 U104.16@15.3,51.465
  Bottom Layer w0.185: P101.20@5.47,43.32 5.19,43.04 4.776,43.04 4.636,42.9 D119.1@4.2,42.9 4.175,42.875 4.175,42.351 4.283,42.242 6.919,42.242 8.9,44.224 8.9,46.613 12.093,49.806 12.093,52.207 13.272,53.387 14.028,53.387 14.671,52.744 14.671,52.237 14.366,51.933 13.966,51.933 13.759,51.726 v1(13.65,51.726)
CH_7_N: D115.1 P100.24 R113.1 U104.8 | length 27.6
  Top Layer w0.185: U104.8@24.7,55.275 25.288,55.275 25.479,55.083 25.479,54.93 25.599,54.81 26.292,54.81 26.4,54.919 26.4,55.226 R113.1@26.7,55.525 26.709,55.525 27.008,55.226 27.008,54.926 27.116,54.817 27.434,54.817 27.641,55.024 v1(27.75,55.024)
  Bottom Layer w0.185: v1(27.75,55.024) 27.859,55.024 28.066,54.817 28.466,54.817 28.771,54.513 28.771,53.744 27.767,52.741 27.767,49.083 28.928,47.923 28.928,46.112 32.59,42.449 32.59,40.51 33.386,39.714 35.292,39.714 35.706,39.3 35.914,39.3 D115.1@36.1,39.486 ; D115.1@36.1,39.5 D115.1@36.1,39.486 ; P100.24@36.57,38.24 36.37,38.44 36.37,39.23 36.257,39.343 36.243,39.343 D115.1@36.1,39.486
CH_7_P: D111.1 P100.23 R113.2 U104.7 | length 27.6
  Top Layer w0.185: U104.7@24.7,54.005 25.288,54.005 25.479,54.197 25.479,54.356 25.599,54.475 26.296,54.475 26.405,54.367 26.405,54.07 R113.2@26.7,53.775 26.706,53.775 27.005,54.074 27.005,54.374 27.113,54.482 27.434,54.482 27.641,54.275 v1(27.75,54.275)
  Bottom Layer w0.185: v1(27.75,54.275) 27.859,54.275 28.066,54.482 28.327,54.482 28.436,54.374 28.436,53.883 27.432,52.879 27.432,52.6 27.432,51.6 27.432,48.944 28.593,47.784 28.593,45.973 32.255,42.311 32.255,40.371 32.274,40.352 32.515,40.111 32.515,39.958 32.473,39.915 32.473,39.812 32.713,39.572 32.816,39.572 32.858,39.615 33.011,39.615 33.077,39.549 33.248,39.379 35.154,39.379 35.488,39.044 35.488,38.891 35.445,38.848 35.445,38.781 35.314,38.65 D111.1@35.3,38.65 34.854,38.65 34.832,38.628 34.814,38.628 34.426,38.24 P100.23@34.03,38.24
CH_7_R_N: D131.1 P101.24 U104.13 | length 28.7
  Top Layer w0.185: v1(13.65,55.015) 13.759,55.015 13.966,54.808 14.404,54.808 14.521,54.924 14.521,55.083 14.712,55.275 U104.13@15.3,55.275
  Bottom Layer w0.185: P101.24@5.47,38.24 5.286,38.424 4.476,38.424 4.357,38.542 4.357,38.557 4.214,38.7 4.186,38.7 4,38.886 4,39.094 4.221,39.315 7.678,39.315 11.158,42.794 11.158,47.184 12.546,48.573 13.836,48.573 15.735,50.472 15.735,53.434 14.747,54.421 14.747,54.426 14.366,54.808 13.966,54.808 13.759,55.015 v1(13.65,55.015)
CH_7_R_P: D127.1 P101.23 U104.14 | length 28.7
  Top Layer w0.185: v1(13.65,54.266) 13.759,54.266 13.966,54.473 14.404,54.473 14.521,54.356 14.521,54.197 14.712,54.005 U104.14@15.3,54.005
  Bottom Layer w0.185: P101.23@2.93,38.24 3.125,38.435 3.125,39.239 3.35,39.464 D127.1@3.35,39.5 ; D127.1@3.35,39.486 3.481,39.355 3.548,39.355 3.591,39.312 3.744,39.312 4.082,39.65 7.539,39.65 10.823,42.933 10.823,47.323 12.408,48.908 13.697,48.908 15.239,50.45 15.332,50.543 15.332,50.696 15.224,50.804 14.889,50.804 14.816,50.877 14.816,51.216 14.889,51.289 15.292,51.289 15.4,51.398 15.4,51.953 15.4,53.295 14.412,54.283 14.412,54.288 14.228,54.473 13.966,54.473 13.759,54.266 v1(13.65,54.266)
GND: C201.2 C208.2 C209.2 C210.2 C211.2 C212.2 C213.2 C214.2 C215.2 C216.2 C217.2 C218.2 C219.2 C220.2 C221.2 C222.2 C223.2 C241.2 C242.2 C250.1 C251.2 C252.2 C253.2 C254.2 C255.2 C260.2 C261.2 C262.2 D100.2 D101.2 D102.2 D103.2 D104.2 D105.2 D106.2 D107.2 D108.2 D109.2 D110.2 D111.2 D112.2 D113.2 D114.2 D115.2 L200.4 P100.1 P100.4 P100.7 P100.10 P100.13 P100.16 P100.19 P100.22 P100.25 P102.1 P102.2 R205.2 U100.4 U101.2 U101.4 U101.10 U102.2 U102.4 U102.10 U103.2 U103.4 U103.10 U104.2 U104.4 U104.10 U201.3 U201.11 U203.1 | length 47.3
  Top Layer w0.4: U201.11@35.95,79.35 36.275,79.675 U201.3@37.2,79.675
  Top Layer w0.5: U100.4@22.775,44.805 22.78,44.8 v1(23.95,44.8)
  Top Layer w0.6: v1(23.3,50.18) 23.315,50.195 24,50.195 U104.4@24.7,50.195 25.4,50.195 25.405,50.2 v1(26.1,50.2) ; v1(23.3,57.8) 23.315,57.815 24,57.815 U104.10@24.7,57.815 25.885,57.815 v1(26.1,57.6) ; v1(23.3,63.28) 23.315,63.295 24,63.295 U103.4@24.7,63.295 25.4,63.295 25.405,63.3 v1(26.1,63.3) ; v1(23.3,70.9) 23.315,70.915 24,70.915 U103.10@24.7,70.915 25.885,70.915 v1(26.1,70.7) ; v1(23.3,76.38) 23.315,76.395 24,76.395 U102.4@24.7,76.395 25.4,76.395 25.405,76.4 v1(26.1,76.4) ; v1(23.3,84) 23.315,84.015 24,84.015 U102.10@24.7,84.015 25.885,84.015 v1(26.1,83.8) ; v1(23.3,89.48) 23.315,89.495 U101.4@24,89.495 ; v1(23.3,97.1) 23.315,97.115 U101.10@24,97.115 ; U101.4@24,89.495 U101.4@24.7,89.495 25.4,89.495 25.405,89.5 v1(26.1,89.5) ; U101.10@24,97.115 U101.10@24.7,97.115 ; U104.2@24.7,47.655 v1(26.1,47.655) ; U103.2@24.7,60.755 v1(26.1,60.755) ; U102.2@24.7,73.855 v1(26.1,73.855) ; U101.2@24.7,86.955 v1(26.1,86.955) ; U101.10@24.7,97.115 25.885,97.115 v1(26.1,96.9) ; v1(32.55,81.995) R205.2@32.55,82.82
  Bottom Layer w0.4: v1(33.35,67.75) D104.2@34,67.75 ; D107.2@33.55,42.05 33.575,42.075 33.575,42.527 34.03,42.982 P100.19@34.03,43.32 ; D106.2@33.55,49.65 33.575,49.675 33.575,50.147 34.03,50.602 P100.13@34.03,50.94 ; P100.7@34.03,58.56 34.368,58.56 34.833,59.025 35.275,59.025 D109.2@35.3,59.05 ; D111.2@35.3,37.75 35.325,37.75 35.35,37.725 35.35,37.6 v1(35.75,37.2) ; D110.2@35.3,45.45 35.325,45.45 35.35,45.425 35.35,45.184 35.675,44.859 v1(35.675,44.85) ; D101.2@35.3,53.05 35.325,53.05 35.35,53.025 35.35,52.809 35.675,52.484 v1(35.675,52.474) ; D113.2@35.3,55.75 35.325,55.775 35.987,55.775 36.232,56.02 P100.10@36.57,56.02 ; P100.22@36.57,40.78 36.57,41.118 36.975,41.523 36.975,42.025 D103.2@37,42.05 ; P100.16@36.57,48.4 36.57,48.738 36.975,49.143 36.975,49.625 D102.2@37,49.65 ; D100.2@36.6,67.75 v1(37.25,67.75) ; D115.2@37,39.5 v1(37.65,39.5) ; D114.2@37,47.1 v1(37.65,47.1) ; D105.2@37,54.75 v1(37.65,54.75) ; v1(38,60.45) D112.2@38,61.1 ; D108.2@38,63.6 v1(38,64.254)
  other v1: 37.4,12.65 37.4,13.55 37.4,14.55 37.4,15.55 37.4,16.55 37.4,17.5 37.4,18.1 28.45,26.55 28.45,27.6 28.45,28.65 29.45,32.85 29.45,33.9 29.45,34.95 24.15,35.8 24.9,36.5 24.9,37.5 24.15,38.2 29.5,39 30.1,39.05 26.65,45.95 27.25,45.95 27.9,47.3 26.3,52.85 29.2,55.2 27.45,57.5 29.35,57.5 26.65,59.05 27.25,59.05 27.9,60.4 29.6,63.95 26.3,65.95 29.6,66.65 29.6,68.55 27.45,70.6 29.35,70.6 26.65,72.15 27.25,72.15 35.8,72.25 35.8,72.85 35.8,73.45 27.9,73.5 38.05,73.85 38.05,75.6 29.15,75.65 29.75,75.65 34.6,75.65 35.4,75.65 35.95,78.7 26.3,79.05 35.95,80 28.65,80.46 28.65,81.21 27.45,83.7 29.35,83.7 26.65,85.25 27.25,85.25 27.9,86.6 31.35,88.45 33.85,88.45 31.35,89.05 33.85,89.05 35.45,90.05 37.95,90.05 35.45,90.65 37.95,90.65 30.25,91.01 30.25,91.76 26.3,92.15 29.1,93.15 29.65,94.8 27.45,96.8 29.35,96.8
GND_ISO: C206.2 C224.2 C225.2 C226.2 C227.2 C228.2 C229.2 C230.2 C231.2 C232.2 C233.2 C234.2 C235.2 C236.2 C237.2 C238.2 C239.2 C243.2 C244.2 C245.2 C246.2 C247.2 C248.2 C249.2 C250.2 C256.2 C257.2 C258.2 C259.2 C264.2 C265.2 C266.2 D116.2 D117.2 D118.2 D119.2 D120.2 D121.2 D122.2 D123.2 D124.2 D125.2 D126.2 D127.2 D128.2 D129.2 D130.2 D131.2 F200.4 P101.1 P101.4 P101.7 P101.10 P101.13 P101.16 P101.19 P101.22 P101.25 R209.2 U100.5 U101.11 U101.17 U101.19 U102.11 U102.17 U102.19 U103.11 U103.17 U103.19 U104.11 U104.17 U104.19 U202.3 U202.11 U203.4 | length 55.6
  Top Layer w0.4: U202.11@5.7,79.35 6.025,79.675 U202.3@6.95,79.675 ; U203.4@16.54,36.75 16.69,36.9 16.69,37.515 17.472,38.297 17.518,38.297 18.175,38.954 C250.2@18.175,39
  Top Layer w0.5: v1(16.05,44.8) 17.22,44.8 U100.5@17.225,44.805
  Top Layer w0.6: R209.2@1.425,80.2 v1(2.25,80.2) ; v1(13,38.1) 13,37.275 C249.2@13.125,37.15 13.125,37.025 13.275,36.875 13.4,36.875 13.675,36.6 v1(13.95,36.6) ; v1(13.9,47.655) U104.19@15.3,47.655 ; v1(13.9,50.2) 14.595,50.2 14.6,50.195 U104.17@15.3,50.195 16,50.195 16.685,50.195 v1(16.7,50.18) ; v1(13.9,57.6) 14.115,57.815 16.685,57.815 v1(16.7,57.8) ; v1(13.9,60.755) U103.19@15.3,60.755 ; v1(13.9,63.3) 14.595,63.3 14.6,63.295 U103.17@15.3,63.295 16,63.295 16.685,63.295 v1(16.7,63.28) ; v1(13.9,70.7) 14.115,70.915 U103.11@15.3,70.915 16,70.915 16.685,70.915 v1(16.7,70.9) ; v1(13.9,73.855) U102.19@15.3,73.855 ; v1(13.9,76.4) 14.595,76.4 14.6,76.395 U102.17@15.3,76.395 16,76.395 16.685,76.395 v1(16.7,76.38) ; v1(13.9,83.8) 14.115,84.015 U102.11@15.3,84.015 16,84.015 16.685,84.015 v1(16.7,84) ; v1(13.9,86.955) U101.19@15.3,86.955 ; v1(13.9,89.5) 14.595,89.5 14.6,89.495 U101.17@15.3,89.495 ; v1(13.9,96.9) 14.115,97.115 U101.11@15.3,97.115 ; U101.17@15.3,89.495 16,89.495 16.685,89.495 v1(16.7,89.48) ; U101.11@15.3,97.115 U101.11@16,97.115 ; U101.11@16,97.115 16.685,97.115 v1(16.7,97.1)
  Bottom Layer w0.4: v1(1.8,39.5) D127.2@2.45,39.5 ; v1(1.85,54.75) D117.2@2.5,54.75 ; D126.2@2.45,44.6 2.475,44.575 2.475,44.113 2.93,43.658 P101.19@2.93,43.32 3.268,43.32 3.723,43.775 4.175,43.775 D119.2@4.2,43.8 ; D122.2@2.45,49.65 2.475,49.675 2.475,50.147 2.93,50.602 P101.13@2.93,50.94 3.268,50.94 3.703,51.375 4.175,51.375 D118.2@4.2,51.4 ; P101.7@2.93,58.56 3.268,58.56 3.683,58.975 4.175,58.975 D125.2@4.2,59 ; v1(3.704,46.9) 4.15,46.454 4.15,46.375 4.175,46.35 D130.2@4.2,46.35 ; D123.2@4.15,40.35 4.702,40.35 5.132,40.78 P101.22@5.47,40.78 ; D120.2@4.15,63.15 4.642,63.15 5.132,63.64 P101.4@5.47,63.64 ; v1(4.2,37.2) D131.2@4.2,37.8 ; v1(4.2,52.4) D121.2@4.2,53.05 ; D129.2@4.2,55.6 4.225,55.625 4.737,55.625 5.132,56.02 P101.10@5.47,56.02 ; v1(4.2,60) D124.2@4.2,60.65 ; D128.2@5.9,62.35 5.875,62.375 5.875,62.897 5.47,63.302 P101.4@5.47,63.64 ; D116.2@5.9,64.9 5.875,64.875 5.875,64.383 5.47,63.978 P101.4@5.47,63.64
  other v1: 3.16,25.85 3.16,26.45 3.16,27.05 3.16,27.65 3.76,27.7 4.36,27.7 11.25,28.95 12.3,28.95 13.35,28.95 12.6,31.3 13.2,31.3 12.2,35.15 12.2,35.75 15.75,36.35 15.75,37.1 13.75,38.25 15.65,38.25 11.5,40.55 12.3,40.55 13.85,44.5 13.85,45.1 12.75,45.95 13.35,45.95 12.1,47.3 11.25,51.75 12.75,54.25 12.75,55 10.65,57.5 12.55,57.5 12.75,59.05 13.35,59.05 12.1,60.4 12.75,64.8 12.75,65.55 12.85,66.95 10.65,70.6 12.55,70.6 12.75,72.15 13.35,72.15 5.55,72.25 5.55,72.85 5.55,73.45 12.1,73.5 7.8,73.85 7.8,75.6 4.35,75.65 5.15,75.65 12.85,77.5 11.6,78.15 5.7,78.7 5.7,80 12.75,80.45 12.75,81.2 10.65,83.7 12.55,83.7 12.75,85.25 13.35,85.25 12.1,86.6 5.15,88.45 7.65,88.45 5.15,89.05 7.65,89.05 1.05,90.05 3.55,90.05 12.95,90.45 1.05,90.65 3.55,90.65 10.6,91.7 12.75,93.55 12.75,94.3 7.65,96.7 10.65,96.8 12.55,96.8 7.65,97.3
GND_ISO_BF: C205.2 F200.3 L201.3
  other v1: 14.05,17.8 15.15,17.8 16.15,17.8 12.95,22.9 12.95,23.65 12.95,24.4 12.95,25.15
I2C_SCL: P100.27 R102.1 U100.3 | length 27.9
  Top Layer w0.35: U100.3@22.775,43.535 22.815,43.575 R102.1@26.2,43.575 31.592,43.575 33.024,42.143 37.607,42.143 38.45,41.3 38.45,35.3 37.575,34.425 35.295,34.425 P100.27@34.03,33.16
I2C_SCL_R: P101.27 R105.1 U100.6 | length 37.1
  Top Layer w0.35: P101.27@2.93,33.16 4.2,34.43 4.2,36.25 4.95,37 6.15,37 6.75,37.6 6.75,50.05 7.7,51 10.95,51 11.6,50.35 11.6,48 11.4,47.8 11.4,44.093 12.018,43.475 R105.1@13.8,43.475 ; R105.1@13.84,43.535 U100.6@17.225,43.535
I2C_SDA: P100.26 R103.1 U100.2 | length 19.4
  Top Layer w0.35: U100.2@22.775,42.265 24.051,42.265 24.461,42.675 R103.1@24.6,42.675 28.444,42.675 28.719,42.95 31.1,42.95 31.95,42.1 ; 31.947,42.097 32.55,41.494 32.55,37.516 33.166,36.9 34.84,36.9 35.29,36.45 35.715,36.45 36.465,35.7 P100.26@36.57,35.7
I2C_SDA_R: P101.26 R104.1 U100.7 | length 33.3
  Top Layer w0.35: P101.26@5.47,35.7 5.56,35.79 6.59,35.79 7.35,36.55 7.35,49.8 8.05,50.5 10.556,50.5 11.1,49.956 11.1,48.4 10.85,48.15 10.85,43.3 11.475,42.675 R104.1@15.4,42.675 15.539,42.675 15.949,42.265 U100.7@17.225,42.265
NetA102_1: A102.1 P102.3 P102.4 R100.1
NetA103_1: A103.1 P100.28 P100.29 R101.1 | length 3.6
  Bottom Layer w1.5: P100.29@34.03,30.62 P100.28@36.57,33.16
NetC200_1: C200.1 C202.1 C203.1 L200.2 R201.1 U200.1 | length 24
  Top Layer w0.16: R201.1@30.15,45.825 30.086,45.825 29.611,45.35 22.05,45.35 21.7,45 21.7,40.671 22.021,40.35 23.326,40.35 23.626,40.05 27.937,40.05 28.685,39.302 28.685,38.035 U200.1@30.16,36.56
  other v1: 29.4,19.55 29.4,20.15 29.4,21.05 29.4,21.95 29.4,22.95 29.4,23.95 29.4,24.95
NetC200_2: C200.2 C204.1 L201.1 R200.1 U200.6 | length 37.3
  Top Layer w0.3: R200.1@9.85,35.575 9.948,35.575 10.194,35.329 10.194,35.056 11.5,33.75 11.5,32.286 10.839,31.625 10.829,31.625 10.479,31.275 C204.1@10.1,31.275
  Top Layer w1: L201.1@1.4,14.8 1.4,18.3 3,19.9 3,21.9 4.6,23.5 7.35,23.5 9.84,25.99 U200.6@9.84,28.94
  Bottom Layer w0.5: U200.6@9.84,28.94 9.917,28.863 9.917,27.683 10.6,27 13.95,27 15.5,25.45 15.5,24.275 C200.2@17.775,22
NetC202_2: C202.2 C203.2 C207.1 L200.3 U200.2 | length 16.1
  Bottom Layer w0.3: C207.1@21.925,53.475 24.3,51.1 24.3,46.3 26.585,44.015 27.785,44.015 U200.2@30.16,41.64
  Bottom Layer w1: C207.1@21.925,53.475 C207.1@21.925,53.6
  other v1: 29.4,12.65 29.4,13.55 29.4,14.55 29.4,15.55 29.4,16.55 29.4,17.5 29.4,18.1
NetC204_2: C204.2 C207.2 L201.4 R202.1 U200.4 | length 48.9
  Top Layer w1: L201.4@1.4,23.2 1.4,24.55 1.65,24.8 6.75,24.8 8.05,26.1 8.05,31.75 C204.2@9.625,33.325 ; C204.2@9.775,33.325 C204.2@9.625,33.325 ; U200.4@9.84,49.26 9.84,42.767 8.227,41.154 8.227,34.723 C204.2@9.625,33.325 ; C204.2@10.1,33.325 C204.2@9.625,33.325
  Bottom Layer w0.3: U200.4@9.84,49.26 9.84,51.64 11.05,52.85 11.05,54.7 12.45,56.1 14.933,56.1 16.841,54.192 17.483,54.192 C207.2@18.075,53.6